# EAGLE board Node (EAGLE 9.1.3)
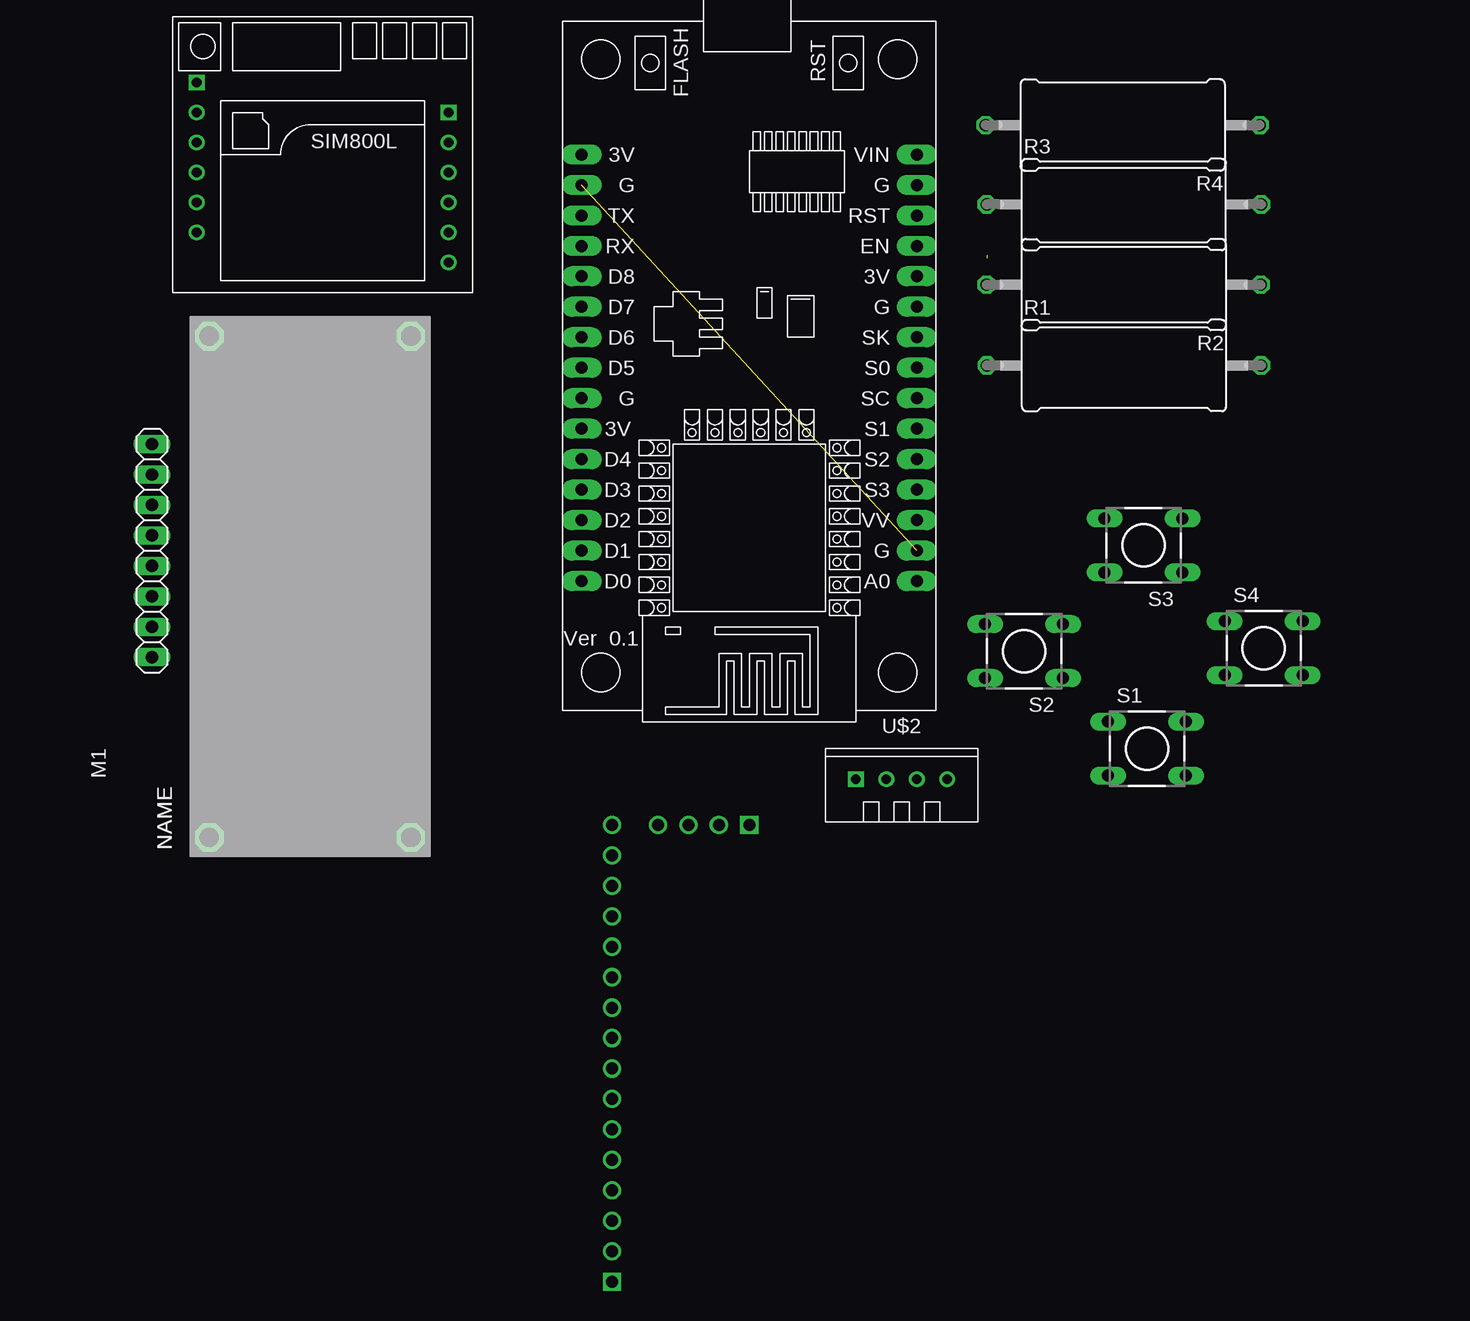
[diagram p0: board, top side]
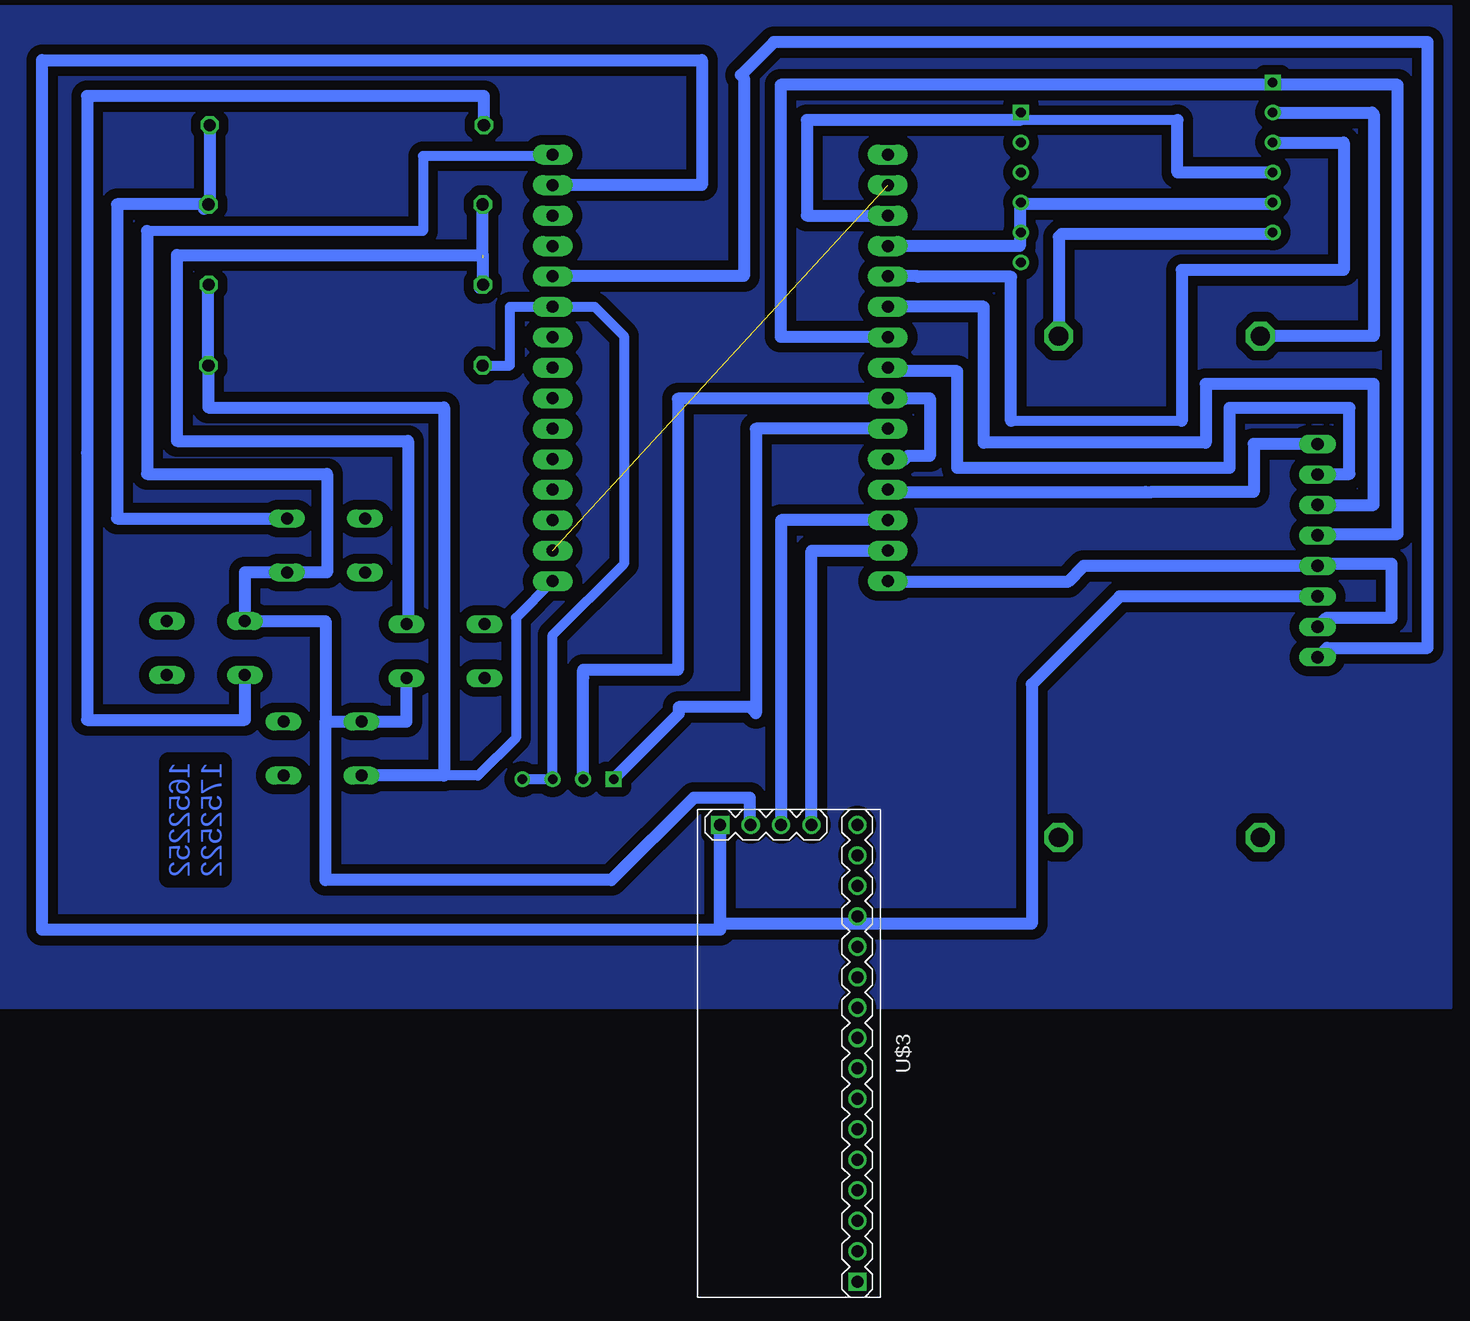
[diagram p1: board, bottom side, seen from below]

No outline drawn. Coordinates in mm, seen from the top.
Copper layers (1*16): Top 0.035mm / dielectric 1.5mm / Bottom 0.035mm
Design rules "default *": minimum track width 12mil, minimum drill 0.35mm, track to track 20mil, track to pad 20mil, pad to pad 20mil, via to via 20mil, smd to smd 20mil, copper to edge 40mil, drill to drill 6mil, minimum pad ring 10mil, minimum via ring 8mil, stop-mask expansion 4mil, vias tented up to drill 0mil, thermal gap 10mil

## Footprints (pad centres in the part's own frame; a part is rotated, then mirrored left to right if it is on the bottom)
RFID-RC522 = drill 1.016 long: 3V3 -8.89,0; GND -3.81,0; IRQ -1.27,0; MISO 1.27,0; MOSI 3.81,0; RST -6.35,0; SCK 6.35,0; SS 8.89,0
P0817/22 = drill 1.016 octagon: 1 -11.43,0; 2 11.43,0
DTS-6 = drill 1 long: 1 -3.25,2.25; 2 3.25,2.25; 3 -3.25,-2.25; 4 3.25,-2.25
NODEMCU = drill 1 pad 1.676 long: 1 -13.97,17.78; 2 -13.97,15.24; 3 -13.97,12.7; 4 -13.97,10.16; 5 -13.97,7.62; 6 -13.97,5.08; 7 -13.97,2.54; 8 -13.97,0; 9 -13.97,-2.54; 10 -13.97,-5.08; 11 -13.97,-7.62; 12 -13.97,-10.16; 13 -13.97,-12.7; 14 -13.97,-15.24; 15 -13.97,-17.78; 16 13.97,-17.78; 17 13.97,-15.24; 18 13.97,-12.7; 19 13.97,-10.16; 20 13.97,-7.62; 21 13.97,-5.08; 22 13.97,-2.54; 23 13.97,0; 24 13.97,2.54; 25 13.97,5.08; 26 13.97,7.62; 27 13.97,10.16; 28 13.97,12.7; 29 13.97,15.24; 30 13.97,17.78
TEMP-HUM-SENSOR-DHT11 = drill 0.8 square: 1 -3.81,0 | drill 0.8: 2 -1.27,0; 3 1.27,0; 4 3.81,0
LCD-I2C-CONVERTER = drill 1 square: J1.1 -19.05,-5.08; J2.1 19.05,6.35 | drill 1: J1.2 -19.05,-2.54; J1.3 -19.05,0; J1.4 -19.05,2.54; J2.2 16.51,6.35; J2.3 13.97,6.35; J2.4 11.43,6.35; J2.5 8.89,6.35; J2.6 6.35,6.35; J2.7 3.81,6.35; J2.8 1.27,6.35; J2.9 -1.27,6.35; J2.10 -3.81,6.35; J2.11 -6.35,6.35; J2.12 -8.89,6.35; J2.13 -11.43,6.35; J2.14 -13.97,6.35; J2.15 -16.51,6.35; J2.16 -19.05,6.35
SIM800LMODULE = drill 0.8: DTR 10.5,1; GND -10.5,-6.5; MIC+ 10.5,-1.5; MIC- 10.5,-4; RST -10.5,1; RX -10.5,-1.5; SPK+ 10.5,-6.5; SPK- 10.5,-9; TX -10.5,-4; VCC -10.5,3.5 | drill 0.8 square: NET -10.5,6; RING 10.5,3.5
CP8-ADJ = drill 1.6 octagon: IN+ -21.81,7.05; IN- -21.81,-9.75; OUT+ 19.99,7.05; OUT- 19.99,-9.75

## Placement (x,y rotation side)
M1  [RFID-RC522]  11.16,38.1 90 top
R1  [P0817/22]  92.2,53.53 0 top
R2  [P0817/22]  92.17,60.27 180 top
R3  [P0817/22]  92.19,66.96 0 top
R4  [P0817/22]  92.09,73.57 180 top
S1  DTS-6  [DTS-6]  94.12,21.6 0 top
S2  DTS-6  [DTS-6]  83.87,29.71 180 top
S3  DTS-6  [DTS-6]  93.82,38.53 180 top
S4  DTS-6  [DTS-6]  103.85,29.97 0 top
U$1  NODEMCU  [NODEMCU]  60.96,53.34 180 top
U$2  TEMP-HUM-SENSOR-DHT11  [TEMP-HUM-SENSOR-DHT11]  73.66,19.05 0 top
U$3  LCD-I2C-CONVERTER  [LCD-I2C-CONVERTER]  55.88,-3.81 270 bottom
U$4  SIM800LMODULE  [SIM800LMODULE]  25.4,71.12 0 top
U$5  CP8-ADJ  [CP8-ADJ]  23,36 90 top

## Library data of the parts
M1 = mfrc522-module
R1-R4 = rcl; SPICEPREFIX: R
S1-S4 = switch-tact
U$1 = nodemcu
U$2 U$3 = diy-modules(1)
U$4 = SIM800LMODULE
U$5 = userlib

## Nets
3V: U$1.16
GND: U$1.2 U$1.17
N$1: U$4.GND U$5.OUT-
N$2: U$4.VCC U$5.OUT+
N$3: U$1.20 U$4.RST
N$4: U$1.18 U$4.RX
N$5: U$1.19 U$4.TX
N$6: M1.MISO U$1.22
N$7: M1.MOSI U$1.21
N$8: M1.SCK U$1.23
N$9: U$1.25 U$2.1
N$10: M1.SS U$1.27
N$11: U$1.24 U$1.26 U$2.2
N$12: U$1.29 U$3.J1.4
N$13: U$1.28 U$3.J1.3
N$14: M1.GND U$1.14 U$3.J1.1
N$15: R1.1 U$1.10 U$2.3 U$2.4
N$16: M1.IRQ M1.RST U$1.30
N$17: M1.3V3 U$1.11
N$18: R1.2 R2.1 S1.3 U$1.1
N$21: R2.2 R3.1 S2.3
N$22: R3.2 R4.1 S3.3
N$23: R4.2 S4.3
N$24: S1.1 S2.1 S3.1 S4.1 U$1.15 U$3.J1.2

## Tracks (layer width: path | path; a pad name or v marks a point on that pad's centre or on a via)
BORDER
  pour Bottom (isolate 0.813): 0,83.5 121.5,83.5 121.5,0 0,0
GND  (1 unrouted)
N$1
  Bottom 0.305: U$4.GND 15.02,64.5 | 32.5,64.5 32.75,64.25
  Bottom 1: 15.02,64.5 32.5,64.5 | 32.75,64.25 U$5.OUT-
N$2
  Bottom 0.305: 6.62,74.62 6.5,74.5 | U$5.OUT+
  Bottom 1: U$4.VCC 6.62,74.62 | 6.5,74.5 6.5,56 U$5.OUT+
N$3
  Bottom 0.813: 22.5,48.9 36.71,48.9
  Bottom 1: 36.71,48.9 36.71,60.92 44.45,60.92 44.49,60.96 U$1.20 | U$4.RST 9,72.12 9,61.5 22.5,61.5 22.5,48.9
N$4
  Bottom 0.813: 22.85,74 36,74
  Bottom 1: 22.85,69.62 22.85,74
  Bottom 1.016: U$4.RX 22.85,69.62 | U$1.18 53.75,66.04 53.75,74 36,74
N$5
  Bottom 1: U$1.19 36,63.5 36,67 32.5,67 25,67
  Bottom 1.016: U$4.TX 14.9,67 25,67
N$6
  Bottom 0.305: M1.MISO 11.03,39.5
  Bottom 1: 11.03,39.5 4.5,39.5 4.5,76.93 55.92,76.93 55.92,55.92 47.03,55.92 U$1.22
N$7
  Bottom 1: M1.MOSI 6.5,41.91 6.5,52 20.5,52 20.5,47.09 39,47.09 39,58.42 U$1.21
N$8
  Bottom 1: M1.SCK 11.11,44.5 8.51,44.5 8.51,50 18.51,50 18.51,45 41.2,45 41.2,53.05 46.7,53.05 U$1.23
N$9
  Bottom 0.305: 69.7,19.25 U$2.1 | 48.62,48.51 U$1.25
  Bottom 1: 48.26,48.26 U$1.25 58,48.26 58,24.55 58.5,25.05 64.42,25.05
  Bottom 1.016: 64.42,25.05 64.42,24.48 U$2.1
N$10
  Bottom 1: M1.SS 16.51,46.99 16.5,46.98 16.5,43 25,43 25.5,43 46.81,43 U$1.27
N$11
  Bottom 1: U$1.24 47.03,50.76 64.5,50.76 64.5,28.16 72.39,28.16 72.39,27.5 U$2.2 | 45.53,50.76 46.95,50.76 U$1.24 | U$1.26 45.57,45.72 45.29,46 43.5,46 43.5,50.8 U$1.24
N$12
  Bottom 1.016: U$3.J1.4 53.34,38.1 U$1.29
N$13
  Bottom 1.016: U$3.J1.3 55.88,40.64 U$1.28
N$14
  Bottom 1: U$3.J1.1 60.96,6.5 117.5,6.5 117.5,79 62.5,79 62.5,68.58 U$1.14
  Bottom 1.016: 61.2,15 U$3.J1.1 60.96,7 35,7 35,26.95 27.66,34.29 M1.GND
N$15
  Bottom 0.813: U$2.4 U$2.3 74.93,31.07 69,37 69,56 71.42,58.42 U$1.10 78.5,58.42 78.5,53.53 R1.1
N$16
  Bottom 0.305: 11.36,31.85 M1.RST
  Bottom 1: M1.RST 10.39,32.52 5,32.52 5,37 10.99,37 M1.IRQ 30.67,36.83 32,35.5 46.93,35.5 U$1.30
N$17
  Bottom 1: M1.3V3 10.39,29.98 2,29.98 2,80.5 56.5,80.5 59.25,77.75 59,77.5 59,61 74.89,61 U$1.11
N$18
  Bottom 0.813: U$1.1 78,32.49 78,22.5 81.15,19.35 84,19.35
  Bottom 1.016: R2.1 103.63,60.24 R1.2 103.63,50.03 84,50.03 84,19.35 S1.3
N$21  (1 unrouted)
  Bottom 1.016: 86.84,32.24 S2.3 87,32.08 87,47.25 106.25,47.25 106.25,62.75 80.76,62.75 80.76,60.29 R2.2 81.01,60 | 80.76,62.5 R3.1
N$22
  Bottom 1.016: 97,40.85 S3.3 111.25,40.78 111.25,66.96 111,66.96 | 103.62,73.47 R4.1 103.52,67.06 R3.2 | R3.2 103.98,66.6 | 111,66.96 111,67 | R3.2 111,66.96
N$23
  Bottom 1: S4.3 100.6,24 113.75,24 113.75,46.25
  Bottom 1.016: R4.2 80.66,76 113.75,76 113.75,46.25
N$24
  Bottom 0.813: U$1.15 75.05,71 85.75,71 85.75,64.75 108.75,64.75
  Bottom 1: U$3.J1.2 58.5,15.32 58.5,17.5 63.17,17.5 70.04,10.63 93.87,10.63 93.87,23.85
  Bottom 1.016: S1.1 87.12,23.85 S2.1 | S4.1 100.6,32 | S3.1 97,36.28 | S3.1 100.6,36.28 S4.1 | S1.1 91,23.85 | S4.1 93.87,32.22 93.87,23.85 S1.1 | 108.75,64.75 108.75,44.5 93.75,44.5 93.75,36.28 S3.1

## Text on the board
Bottom: 1652252 / 1752522